# Altium PCB Roa_Circuit_1st_V1.PcbDoc
Units mm, origin at the board's own origin, x right, y up, seen from the top; angles counter-clockwise.
Board outline 167.01 x 80.01 mm, 2 copper layers (Top Layer, Bottom Layer); 17 components, 27 nets, 54 pads, 0 vias.
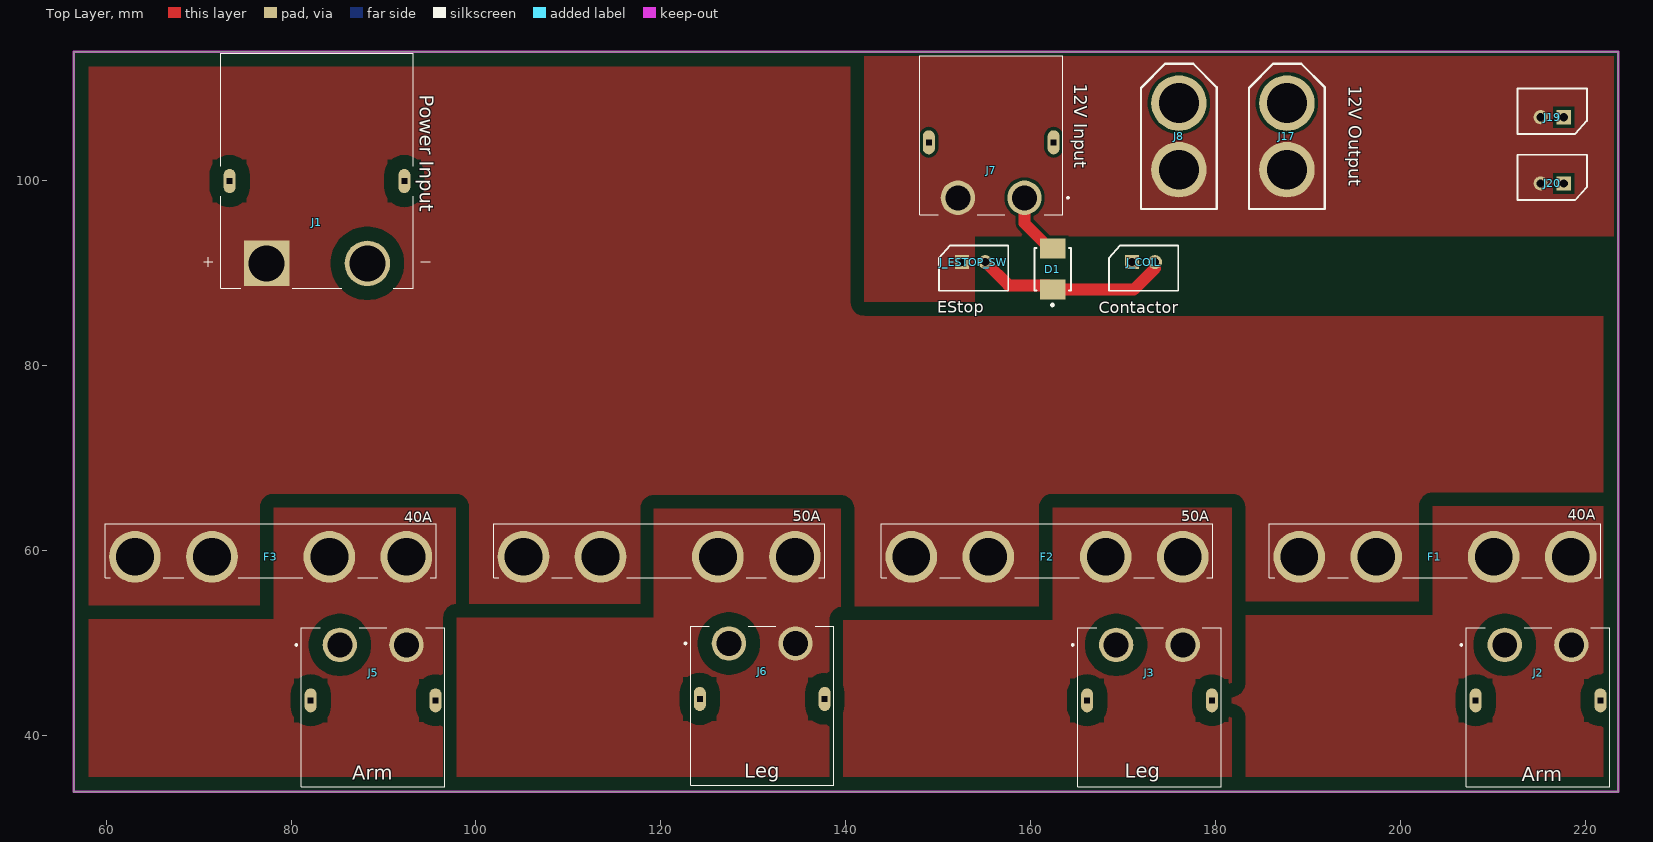
[diagram p0: Top Layer view]
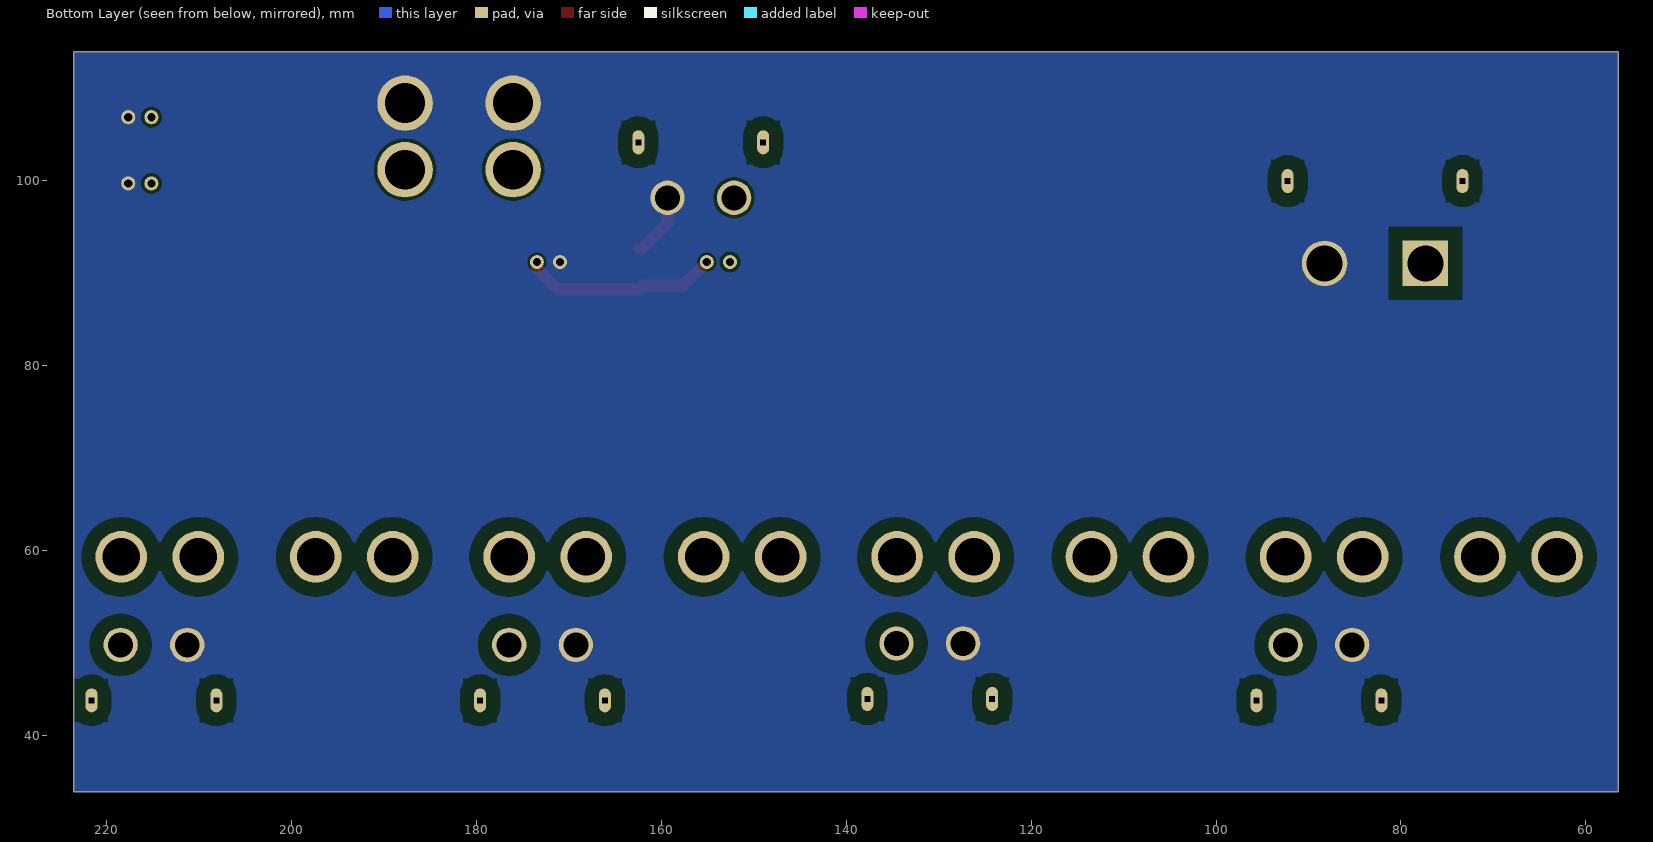
[diagram p1: Bottom Layer view, seen from below]
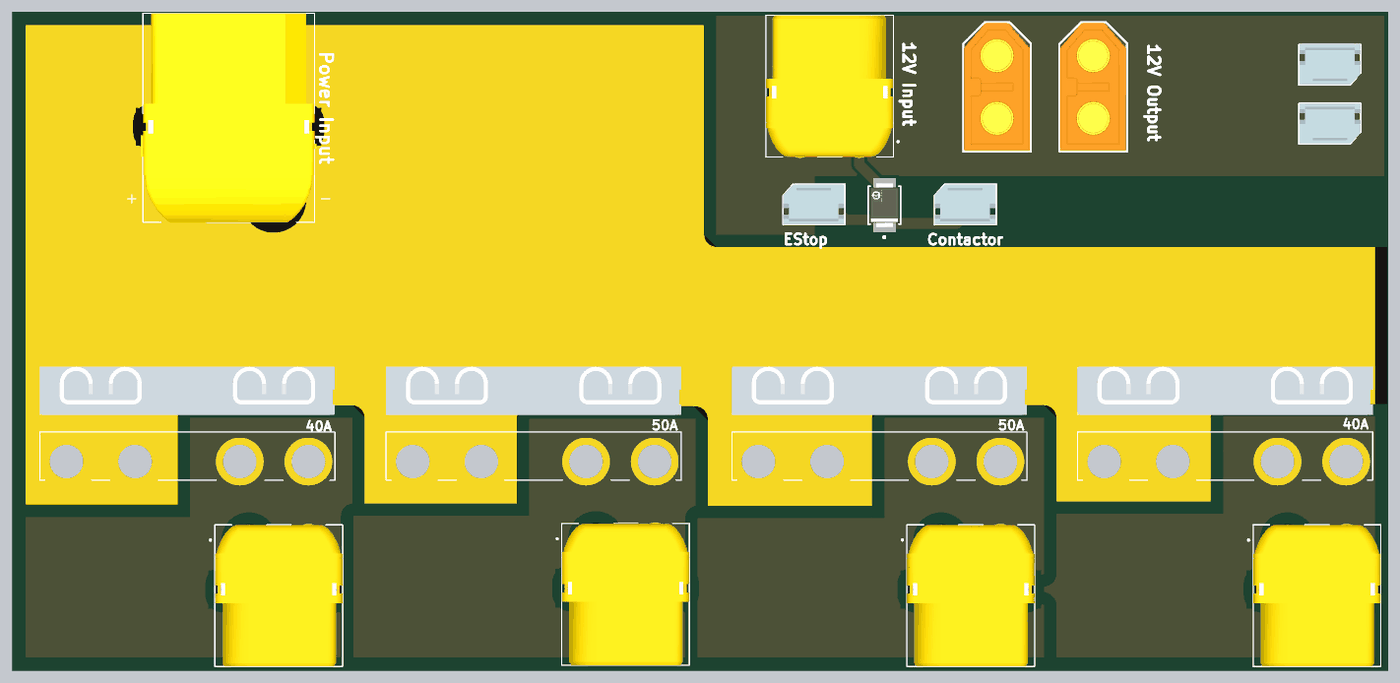
[diagram p2: 3D render of the assembled board from above, using the file's embedded part models]

## Layer stack, top to bottom
Top Solder: solder mask 0.0102, Solder Resist, Dk 3.5
Top Layer: signal copper 0.0356
Dielectric 1: dielectric 0.32, FR-4, Dk 4.8
Bottom Layer: signal copper 0.0356
Bottom Solder: solder mask 0.0102, Solder Resist, Dk 3.5

## Board outline
56.515,33.909 56.515,113.919 223.52,113.919 223.52,33.919 223.52,33.909

## Design rules (kind name [scope] priority, off if disabled: settings)
Clearance Clearance_5 [InNetClass('NewClass')] p1: gap=1.5 ignorepadtopadclearanceinfootprint=FALSE
Clearance Clearance_1 [InNet('v_IN')] p2: gap=1.5 ignorepadtopadclearanceinfootprint=FALSE
Clearance Clearance_4 [InNet('12v_IN')] p3: gap=0.35 ignorepadtopadclearanceinfootprint=FALSE
Clearance Clearance_3 [InNet('COIL_EN')] p4: gap=0.254 ignorepadtopadclearanceinfootprint=FALSE
Clearance Clearance_2 [InNet('GND')] p5: gap=1.5 ignorepadtopadclearanceinfootprint=FALSE except(0.2: Arc-SMDPad Track-SMDPad SMDPad-SMDPad)
Clearance [All] p6: gap=0.254 ignorepadtopadclearanceinfootprint=FALSE
PlaneConnect [All] p1: planeconnectstyle=Direct reliefexpansion=0.508 reliefentries=4 reliefconductorwidth=0.254 reliefairgap=0.254
PolygonConnect [All] p1: connectstyle=Direct reliefconductorwidth=0.254 reliefentries=4 polygonreliefangle="90 Angle" airgapwidth=0.254
RoutingVias [All] p1: holewidth=0.711 width=1.27 viastyle="Through Hole" minholewidth=0.711 minwidth=1.27 maxholewidth=0.711 maxwidth=1.27
SolderMaskExpansion [All] p1: expansion=0.102 istentingtop=FALSE
SupplyNets "Schematic Supply Nets" [InNet('GND')] p1: voltage=0.000
Width Width_1 [(InNet('5V') OR InNet('COIL_EN') OR InNet('GND'))] p1: maxlimit=2.032 minlimit=0.254 preferedwidth=1.27 toplayer_minwidth=0.762 bottomlayer_maxwidth=0.254 bottomlayer_prefwidth=0.254 minimp=50.000000 maximp=50.000000 favimp=50.000000
Width [All] p2: maxlimit=0.254 minlimit=0.254 preferedwidth=0.254
29 further rules are at their usual default settings.

## Classes and differential pairs
net class NewClass: ARM_L ARM_R LEG_L LEG_R
component class Sheet2: D1 F1 F2 F3 J1 J2 J3 J5 J6 J7 J8 J17 J19 J20 J_COIL J_ESTOP_SW

## Components (designator, comment, footprint, x,y, rotation, side; value= is the part's Value field where it differs from the comment)
50A "3555-2" FUSE_3555-2 119.806,59.309 r180 top (schematic designator F4)
D1 "cc" FP-403A-03-MFG 162.369,90.424 r90 top
F1 "40A" FUSE_3555-2 203.708,59.309 r180 top
F2 "50A" FUSE_3555-2 161.754,59.309 r180 top
F3 "40A" FUSE_3555-2 77.789,59.309 r180 top
J1 "XT90PW-F" AMASS_XT90PW-F 82.804,99.949 r180 top
J2 "XT60PW-F" XT60PW-F 214.858,49.784 r0 top
J3 "XT60PW-F" XT60PW-F 172.839,49.784 r0 top
J5 "XT60PW-F" XT60PW-F 88.874,49.784 r0 top
J6 "XT60PW-F" XT60PW-F 130.956,49.942 r0 top
J7 "XT60PW-F" XT60PW-F 155.721,98.14 r180 top
J8 "XT60" XT60_F 176.022,104.775 r270 top
J17 "XT60" XT60_F 187.706,104.775 r270 top
J19 "Molex_2Pin" MOLEX_2PIN 215.138,106.851 r180 top
J20 "Molex_2Pin" MOLEX_2PIN 215.138,99.695 r180 top
J_COIL "Molex_2Pin" MOLEX_2PIN 173.442,91.186 r0 top
J_ESTOP_SW "Molex_2Pin" MOLEX_2PIN 155.067,91.186 r0 top

## Footprints (in the part's own frame and the unit in brackets; to place one, negate y for a bottom-side part, rotate by r counter-clockwise, add the part's x,y. Pads: shape width x height; smd on the part's side, far side on the other; paste and mask are expansions set on the pad)
AMASS_XT90PW-F [mm]
  round 4.916 hole 3.9: N(-5.45,8.9)
  rect 4.916x4.916 / inner round 4.916 / far side rect 4.916x4.916 hole 3.9: P(5.45,8.9)
  oval 1.3x2.6 hole 0.6 square: S1(9.45,0) S2(-9.45,0)
  silkscreen extent -12.25,-13.8 12.25,11.6, body extent -10.65,-13.8 10.65,11.6, height 10.3
FP-403A-03-MFG [mm]
  rect 2.159x2.743 smd paste+0 mask+0: 1(-2.21,0) 2(2.21,0)
  silkscreen extent -4,-1.97 2.3,1.97, body extent -3.39,-2.07 3.39,2.07, height 0.25
FUSE_3555-2 [mm]
  round 5.59 hole 4.09: 1_1(-14.685,0) 1_2(-6.355,0) 2_1(6.345,0) 2_2(14.675,0)
  silkscreen extent -17.91,-3.59 17.91,2.25, body extent -17.91,-11.51 17.91,-5.67, height 12.97
MOLEX_2PIN [mil]
  rect 60x60 / inner round 60 / far side round 60 hole 35: 1(-98.43,0)
  round 60 hole 35: 2(0,0)
  silkscreen extent -197,-122 98,71, body extent -196,-123 95,70, height 233
XT60_F [mm]
  round 6 hole 4.3: 1(-3.6,0) 2(3.6,0)
  silkscreen extent -7.85,-4.1 7.85,4.1, body extent -7.8,-4 7.8,4, height 16.8
XT60PW-F [mm]
  round 3.716 hole 2.7: 1(-3.6,0) 2(3.6,0)
  oval 1.3x2.6 hole 0.6 square: S1(-6.75,-6) S2(6.75,-6)
  silkscreen extent -8.4,-15.35 7.75,1.85, body extent -7.75,-15.35 7.75,1.85, height 8.4

## Part data
50A: "Auto Fuse Holder, 1 Fuse, Blade, Standard, THM, 50Amp, Hi-Temp Nylon, UL94V-0", Package=None, Check_prices=https://www.snapeda.com/parts/3555-2/Keystone/view-part/?ref=eda, MF="Keystone Electronics", MP=3555-2, SnapEDA_Link=https://www.snapeda.com/parts/3555-2/Keystone/view-part/?ref=snap
D1: library part CMP-026-000004-1, "Rectifier Diode, Schottky, 1 Phase, 1 Element, 5A, 100V V(RRM), Silicon"
F1 F2 F3: library part 3555-2, "Auto Fuse Holder, 1 Fuse, Blade, Standard, THM, 50Amp, Hi-Temp Nylon, UL94V-0", Package=None, Check_prices=https://www.snapeda.com/parts/3555-2/Keystone/view-part/?ref=eda, MF="Keystone Electronics", MP=3555-2, SnapEDA_Link=https://www.snapeda.com/parts/3555-2/Keystone/view-part/?ref=snap
J1: library part CMP-019-000093-4, "Socket, DC supply, XT90, female, PIN:2, on PCBs, THT", Package=Package, Check_prices=https://www.snapeda.com/parts/XT90PW-F/AMASS/view-part/?ref=eda, Component Type=Standard, Design Item ID=XT90PW-F, MF=AMASS, MP=XT90PW-F, Pin Count=2, SnapEDA_Link=https://www.snapeda.com/parts/XT90PW-F/AMASS/view-part/?ref=snap, Source=XT90PW-F.SchLib, System=Connector
J2 J3 J5 J6 J7: library part CMP-019-000058-2, "Socket DC Supply Connector Female", Package=Package, Availability="Not in stock", Check_prices=https://www.snapeda.com/parts/XT60PW-F/AMASS/view-part/?ref=eda, Design Item ID=XT60PW-F, MF=AMASS, MP=XT60PW-F, Price=None, SnapEDA_Link=https://www.snapeda.com/parts/XT60PW-F/AMASS/view-part/?ref=snap, Source=robit_connector.SchLib, System=Connector
J8 J17: library part CMP-019-000061-2, "XT60 connector", System=Connector
J19 J20 J_COIL J_ESTOP_SW: library part CMP-019-000043-2, "Molex 2Pin Connector", Design Item ID=Molex_2Pin, Source=robit_connector.SchLib, System=Connector

## Nets (pads, with @x,y where several pads share a name; then routed paths per layer and width w, separated by ;. In a path a pad name is that pad's centre, name@x,y a point inside that pad or via, vN(x,y) a via of type N, cw(c..) or ccw(c..) an arc to the next point about the centre after c; other vN are vias at no path point)
5V: 
12v_IN: J7.2 J8.2 J17.2 J19.2 J20.2 J_ESTOP_SW.1
ARM_L: F3.1_1 F3.1_2 J5.2
ARM_R: F1.1_1 F1.1_2 J2.2
CAN_H: 
CAN_L: 
COIL_EN: D1.1 J_COIL.2 J_ESTOP_SW.2 | length 21.2
  Top Layer w1.27: J_ESTOP_SW.2@155.116,91.137 157.595,88.658 161.925,88.658 D1.1 171.145,88.214 173.442,90.511 J_COIL.2
GND: D1.2 J1.N J2.1 J3.1 J5.1 J6.1 J7.1 J8.1 J17.1 J19.1 J20.1 J_COIL.1 | length 6.9
  Top Layer w1.27: J7.1 159.321,95.39 162.077,92.634 D1.2
HEAD: 
LEG_L: 50A.1_1 50A.1_2 J6.2
LEG_R: F2.1_1 F2.1_2 J3.2
NetC3_2: 
NetC4_2: 
NetC5_2: 
NetD2_1: 
NetD3_1: 
NetD4_2: 
NetD5_1: 
NetQ1_1: 
NetQ1_3: 
NetQ2_2: 
NetR4_1: 
NetR5_2: 
NetR6_1: 
NetU2_13: 
NetU2_14: 
v_IN: 50A.2_1 50A.2_2 F1.2_1 F1.2_2 F2.2_1 F2.2_2 F3.2_1 F3.2_2 J1.P
pads on no net: J1.S1 J1.S2 J2.S1 J2.S2 J3.S1 J3.S2 J5.S1 J5.S2 J6.S1 J6.S2 J7.S1 J7.S2

## Polygon pours and split planes (outlines as drawn)
v_IN on Top Layer "V_IN_L01_P015" (solid, pour order 15): 181.737,64.643 181.737,52.981 203.454,52.981 203.454,64.643 223.393,64.643 223.393,85.344 141.986,85.344 141.986,114.036 56.515,114.036 56.515,52.912 56.588,52.839 77.924,52.839 77.924,64.897 97.79,64.897 97.79,52.839 119.253,52.839 119.253,64.643 139.7,64.643 139.7,52.451 162.363,52.451 162.363,64.643
ARM_R on Top Layer "ARM_R_L01_P011" (solid, pour order 11): 181.737,34.297 181.737,52.981 203.454,52.981 203.454,64.777 223.379,64.777 223.379,34.297
LEG_R on Top Layer "LEG_R_L01_P004" (solid, pour order 4): 139.7,34.036 139.7,52.451 162.363,52.451 162.363,64.643 181.737,64.643 181.737,34.036
ARM_L on Top Layer "ARM_L_L01_P010" (solid, pour order 10): 56.588,34.156 56.588,52.578 78.105,52.578 78.105,64.636 97.79,64.636 97.79,34.156
LEG_L on Top Layer "LEG_L_L01_P006" (solid, pour order 6): 97.917,34.036 97.917,52.72 119.253,52.72 119.253,64.516 139.432,64.516 139.432,34.036
12v_IN on Top Layer "12V_IN_L01_P001" (solid, pour order 1): 177.038,93.98 223.393,93.98 223.393,113.845 164.539,113.845 141.986,114.046 141.986,86.868 153.924,86.868 153.924,93.98 162.052,93.98
v_IN on Top Solder "tga" (solid, pour order 14): 201.944,64.643 203.595,66.294 223.393,66.294 223.393,85.344 141.986,85.344 140.496,86.834 140.496,112.293 58.135,112.293 58.135,54.05 76.663,54.05 76.663,64.725 78.048,66.11 97.847,66.11 99.289,64.668 99.289,54.229 117.856,54.229 117.856,64.77 119.126,66.04 139.192,66.04 140.941,64.291 140.941,53.946 160.857,53.946 160.857,64.643 162.324,66.11 181.775,66.11 183.243,64.643 183.243,54.483 201.944,54.483
v_IN on Bottom Solder "V_IN_L01_P002" (solid, pour order 2): 182.118,64.643 203.454,64.643 223.393,64.643 223.393,86.487 56.515,86.487 56.515,64.643 97.79,64.643 119.253,64.643 139.7,64.643 162.363,64.643
GND on Bottom Layer "GND_L02_P012" (solid, pour order 12): 56.515,33.909 56.515,113.919 223.52,113.919 223.52,33.919 223.52,33.909

## Keep-outs
Top Layer:
  lines w0.254: 223.515,113.919 56.515,113.919 56.515,33.909 223.52,33.909 ; 223.52,33.919 223.52,113.919

## Silkscreen, mask and mechanical layers (free items; w line width, h text height)
Top Overlay:
  text "12V Input" at 164.677,110.49 h1.4 r270
  text "12V Output" at 194.395,110.236 h1.4 r270
  text "Power Input" at 93.904,109.296 h1.52 r270
  text "EStop" at 149.911,85.691 h1.27
  text "Contactor" at 167.366,85.668 h1.27
  text "Leg" at 129.032,35.433 h1.52
  text "Leg" at 170.18,35.433 h1.52
  text "Arm" at 86.615,35.179 h1.52
  text "Arm" at 213.106,35.052 h1.52
Bottom Overlay: